# Altium PCB NaviGo v3.0.PcbDoc (part 4 of 4)
Units mm, origin at the board's own origin, x right, y up, seen from the top; angles counter-clockwise.
Board outline 144.78 x 52.07 mm, 2 copper layers (Top Layer, Bottom Layer); 380 components, 29 nets, 1630 pads, 230 vias.
Unrouted connection lines stored in the file: 261.
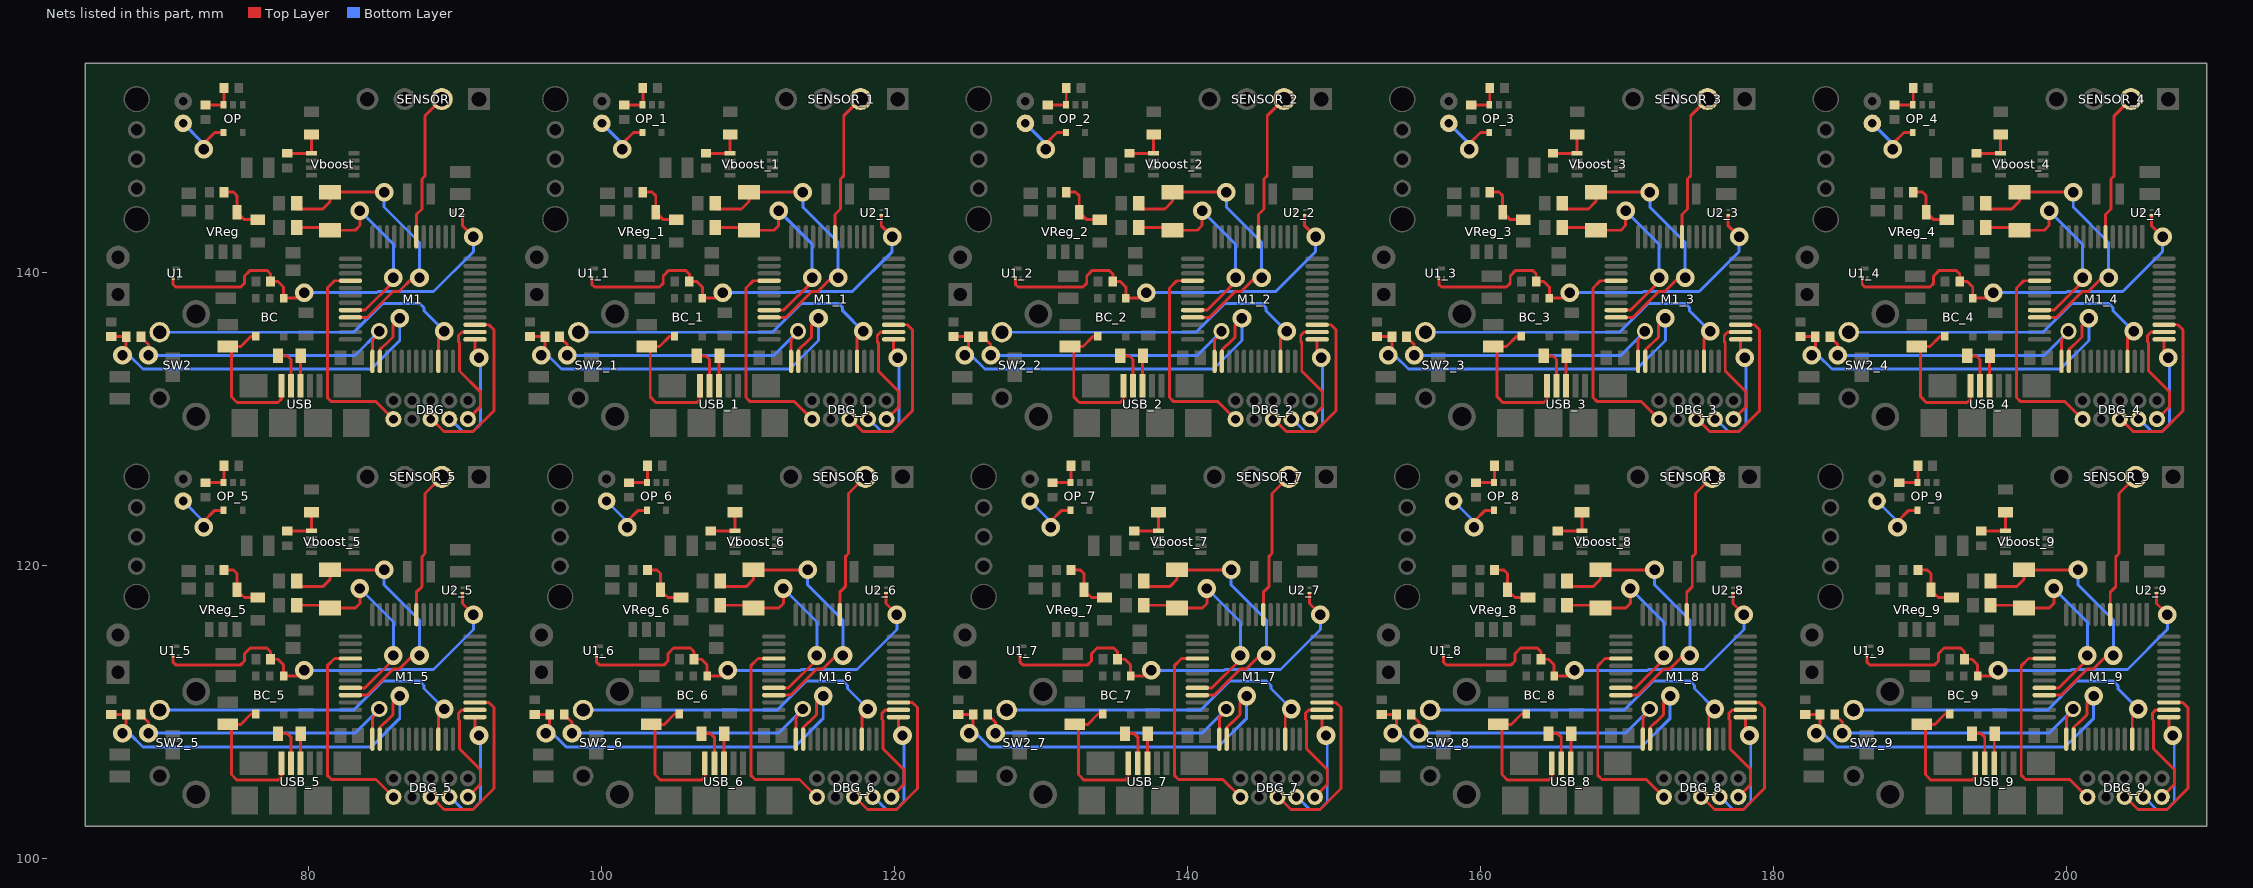
[diagram p4: the nets of this part, all layers, seen from the top]

## Via types
v1: diameter 1.27, hole 0.711, Top Layer to Bottom Layer, 220 vias
v2: diameter 1.1, hole 0.711, Top Layer to Bottom Layer, 10 vias

## Nets (pads, with @x,y where several pads share a name; then routed paths per layer and width w, separated by ;. In a path a pad name is that pad's centre, name@x,y a point inside that pad or via, vN(x,y) a via of type N, cw(c..) or ccw(c..) an arc to the next point about the centre after c; other vN are vias at no path point) (continued)
NetM1_25: M1.25 M1_1.25 M1_2.25 M1_3.25 M1_4.25 M1_5.25 M1_6.25 M1_7.25 M1_8.25 M1_9.25 R14.2 R14_1.2 R14_2.2 R14_3.2 R14_4.2 R14_5.2 R14_6.2 R14_7.2 R14_8.2 R14_9.2 | length 200.4
  Top Layer w0.2: R14_5.2@68.564,109.855 69.088,109.331 v1(69.088,108.585) ; R14.2@68.564,135.636 69.088,135.112 v1(69.088,134.366) ; M1_5.25@84.365,108.181 84.365,109.638 v2@84.836,110.109 ; M1.25@84.365,133.962 84.365,135.419 v2@84.836,135.89 ; R14_1.2@97.139,135.636 97.663,135.112 v1(97.663,134.366) ; R14_6.2@97.464,109.855 97.988,109.331 v1(97.988,108.585) ; M1_1.25@112.94,133.962 112.94,135.419 v2@113.411,135.89 ; M1_6.25@113.265,108.181 113.265,109.638 v2@113.736,110.109 ; R14_2.2@126.039,135.636 126.563,135.112 v1(126.563,134.366) ; R14_7.2@126.364,109.855 126.888,109.331 v1(126.888,108.585) ; M1_2.25@141.84,133.962 141.84,135.419 v2@142.311,135.89 ; M1_7.25@142.165,108.181 142.165,109.638 v2@142.636,110.109 ; R14_3.2@154.939,135.636 155.463,135.112 v1(155.463,134.366) ; R14_8.2@155.264,109.855 155.788,109.331 v1(155.788,108.585) ; M1_3.25@170.74,133.962 170.74,135.419 v2@171.211,135.89 ; M1_8.25@171.065,108.181 171.065,109.638 v2@171.536,110.109 ; R14_4.2@183.839,135.636 184.363,135.112 v1(184.363,134.366) ; R14_9.2@184.164,109.855 184.688,109.331 v1(184.688,108.585) ; M1_4.25@199.64,133.962 199.64,135.419 v2@200.111,135.89 ; M1_9.25@199.965,108.181 199.965,109.638 v2@200.436,110.109
  Bottom Layer w0.2: v1(69.088,108.585) 83.185,108.585 v2(84.836,110.236) ; v1(69.088,134.366) 83.185,134.366 v2(84.836,136.017) ; v1(97.663,134.366) 111.76,134.366 v2(113.411,136.017) ; v1(97.988,108.585) 112.085,108.585 v2(113.736,110.236) ; v1(126.563,134.366) 140.66,134.366 v2(142.311,136.017) ; v1(126.888,108.585) 140.985,108.585 v2(142.636,110.236) ; v1(155.463,134.366) 169.56,134.366 v2(171.211,136.017) ; v1(155.788,108.585) 169.885,108.585 v2(171.536,110.236) ; v1(184.363,134.366) 198.46,134.366 v2(200.111,136.017) ; v1(184.688,108.585) 198.785,108.585 v2(200.436,110.236)
NetM1_26: M1.26 M1_1.26 M1_2.26 M1_3.26 M1_4.26 M1_5.26 M1_6.26 M1_7.26 M1_8.26 M1_9.26 R13.2 R13_1.2 R13_2.2 R13_3.2 R13_4.2 R13_5.2 R13_6.2 R13_7.2 R13_8.2 R13_9.2 R14.1 R14_1.1 R14_2.1 R14_3.1 R14_4.1 R14_5.1 R14_6.1 R14_7.1 R14_8.1 R14_9.1 | length 275.7
  Top Layer w0.2: R13_5.2@66.548,109.871 67.548,109.871 R14_5.1@67.564,109.855 67.564,108.839 v1(67.31,108.585) ; R13.2@66.548,135.652 67.548,135.652 R14.1@67.564,135.636 67.564,134.62 v1(67.31,134.366) ; M1_5.26@84.865,108.181 84.865,108.967 85.199,109.301 85.223,109.301 85.771,109.849 85.771,110.663 v1(86.233,111.125) ; M1.26@84.865,133.962 84.865,134.748 85.199,135.082 85.223,135.082 85.771,135.63 85.771,136.444 v1(86.233,136.906) ; R13_1.2@95.123,135.652 96.123,135.652 R14_1.1@96.139,135.636 96.139,134.62 v1(95.885,134.366) ; R13_6.2@95.448,109.871 96.448,109.871 R14_6.1@96.464,109.855 96.464,108.839 v1(96.21,108.585) ; M1_1.26@113.44,133.962 113.44,134.748 113.774,135.082 113.798,135.082 114.346,135.63 114.346,136.444 v1(114.808,136.906) ; M1_6.26@113.765,108.181 113.765,108.967 114.099,109.301 114.123,109.301 114.671,109.849 114.671,110.663 v1(115.133,111.125) ; R13_2.2@124.023,135.652 125.023,135.652 R14_2.1@125.039,135.636 125.039,134.62 v1(124.785,134.366) ; R13_7.2@124.348,109.871 125.348,109.871 R14_7.1@125.364,109.855 125.364,108.839 v1(125.11,108.585) ; M1_2.26@142.34,133.962 142.34,134.748 142.674,135.082 142.698,135.082 143.246,135.63 143.246,136.444 v1(143.708,136.906) ; M1_7.26@142.665,108.181 142.665,108.967 142.999,109.301 143.023,109.301 143.571,109.849 143.571,110.663 v1(144.033,111.125) ; R13_3.2@152.923,135.652 153.923,135.652 R14_3.1@153.939,135.636 153.939,134.62 v1(153.685,134.366) ; R13_8.2@153.248,109.871 154.248,109.871 R14_8.1@154.264,109.855 154.264,108.839 v1(154.01,108.585) ; M1_3.26@171.24,133.962 171.24,134.748 171.574,135.082 171.598,135.082 172.146,135.63 172.146,136.444 v1(172.608,136.906) ; M1_8.26@171.565,108.181 171.565,108.967 171.899,109.301 171.923,109.301 172.471,109.849 172.471,110.663 v1(172.933,111.125) ; R13_4.2@181.823,135.652 182.823,135.652 R14_4.1@182.839,135.636 182.839,134.62 v1(182.585,134.366) ; R13_9.2@182.148,109.871 183.148,109.871 R14_9.1@183.164,109.855 183.164,108.839 v1(182.91,108.585) ; M1_4.26@200.14,133.962 200.14,134.748 200.474,135.082 200.498,135.082 201.046,135.63 201.046,136.444 v1(201.508,136.906) ; M1_9.26@200.465,108.181 200.465,108.967 200.799,109.301 200.823,109.301 201.371,109.849 201.371,110.663 v1(201.833,111.125)
  Bottom Layer w0.2: v1(67.31,108.585) 67.766,108.585 68.701,107.65 84.282,107.65 86.233,109.601 v1(86.233,111.125) ; v1(67.31,134.366) 67.766,134.366 68.701,133.431 84.282,133.431 86.233,135.382 v1(86.233,136.906) ; v1(95.885,134.366) 96.341,134.366 97.276,133.431 112.857,133.431 114.808,135.382 v1(114.808,136.906) ; v1(96.21,108.585) 96.666,108.585 97.601,107.65 113.182,107.65 115.133,109.601 v1(115.133,111.125) ; v1(124.785,134.366) 125.241,134.366 126.176,133.431 141.757,133.431 143.708,135.382 v1(143.708,136.906) ; v1(125.11,108.585) 125.566,108.585 126.501,107.65 142.082,107.65 144.033,109.601 v1(144.033,111.125) ; v1(153.685,134.366) 154.141,134.366 155.076,133.431 170.657,133.431 172.608,135.382 v1(172.608,136.906) ; v1(154.01,108.585) 154.466,108.585 155.401,107.65 170.982,107.65 172.933,109.601 v1(172.933,111.125) ; v1(182.585,134.366) 183.041,134.366 183.976,133.431 199.557,133.431 201.508,135.382 v1(201.508,136.906) ; v1(182.91,108.585) 183.366,108.585 184.301,107.65 199.882,107.65 201.833,109.601 v1(201.833,111.125)
NetM1_34: M1.34 M1_1.34 M1_2.34 M1_3.34 M1_4.34 M1_5.34 M1_6.34 M1_7.34 M1_8.34 M1_9.34 SW2.1 SW2_1.1 SW2_2.1 SW2_3.1 SW2_4.1 SW2_5.1 SW2_6.1 SW2_7.1 SW2_8.1 SW2_9.1 | length 233.8
  Top Layer w0.2: M1_5.34@88.865,108.181 88.865,109.82 v1(89.281,110.236) ; M1.34@88.865,133.962 88.865,135.601 v1(89.281,136.017) ; M1_1.34@117.44,133.962 117.44,135.601 v1(117.856,136.017) ; M1_6.34@117.765,108.181 117.765,109.82 v1(118.181,110.236) ; M1_2.34@146.34,133.962 146.34,135.601 v1(146.756,136.017) ; M1_7.34@146.665,108.181 146.665,109.82 v1(147.081,110.236) ; M1_3.34@175.24,133.962 175.24,135.601 v1(175.656,136.017) ; M1_8.34@175.565,108.181 175.565,109.82 v1(175.981,110.236) ; M1_4.34@204.14,133.962 204.14,135.601 v1(204.556,136.017) ; M1_9.34@204.465,108.181 204.465,109.82 v1(204.881,110.236)
  Bottom Layer w0.2: SW2_5.1@69.849,110.168 83.098,110.168 85.071,112.141 87.579,112.141 87.884,111.836 87.884,111.633 v1(89.281,110.236) ; SW2.1@69.849,135.949 83.098,135.949 85.071,137.922 87.579,137.922 87.884,137.617 87.884,137.414 v1(89.281,136.017) ; SW2_1.1@98.424,135.949 111.673,135.949 113.646,137.922 116.154,137.922 116.459,137.617 116.459,137.414 v1(117.856,136.017) ; SW2_6.1@98.749,110.168 111.998,110.168 113.971,112.141 116.479,112.141 116.784,111.836 116.784,111.633 v1(118.181,110.236) ; SW2_2.1@127.324,135.949 140.573,135.949 142.546,137.922 145.054,137.922 145.359,137.617 145.359,137.414 v1(146.756,136.017) ; SW2_7.1@127.649,110.168 140.898,110.168 142.871,112.141 145.379,112.141 145.684,111.836 145.684,111.633 v1(147.081,110.236) ; SW2_3.1@156.224,135.949 169.473,135.949 171.446,137.922 173.954,137.922 174.259,137.617 174.259,137.414 v1(175.656,136.017) ; SW2_8.1@156.549,110.168 169.798,110.168 171.771,112.141 174.279,112.141 174.584,111.836 174.584,111.633 v1(175.981,110.236) ; SW2_4.1@185.124,135.949 198.373,135.949 200.346,137.922 202.854,137.922 203.159,137.617 203.159,137.414 v1(204.556,136.017) ; SW2_9.1@185.449,110.168 198.698,110.168 200.671,112.141 203.179,112.141 203.484,111.836 203.484,111.633 v1(204.881,110.236)
NetMOTOR_1: MOTOR.1 MOTOR_1.1 MOTOR_2.1 MOTOR_3.1 MOTOR_4.1 MOTOR_5.1 MOTOR_6.1 MOTOR_7.1 MOTOR_8.1 MOTOR_9.1 OP.4 OP_1.4 OP_2.4 OP_3.4 OP_4.4 OP_5.4 OP_6.4 OP_7.4 OP_8.4 OP_9.4 | length 44.2
  Top Layer w0.2: v1(72.847,122.65) 72.847,123.031 73.614,123.798 OP_5.4@74.214,123.798 ; v1(72.847,148.431) 72.847,148.812 73.614,149.579 OP.4@74.214,149.579 ; v1(101.422,148.431) 101.422,148.812 102.189,149.579 OP_1.4@102.789,149.579 ; v1(101.747,122.65) 101.747,123.031 102.514,123.798 OP_6.4@103.114,123.798 ; v1(130.322,148.431) 130.322,148.812 131.089,149.579 OP_2.4@131.689,149.579 ; v1(130.647,122.65) 130.647,123.031 131.414,123.798 OP_7.4@132.014,123.798 ; v1(159.222,148.431) 159.222,148.812 159.989,149.579 OP_3.4@160.589,149.579 ; v1(159.547,122.65) 159.547,123.031 160.314,123.798 OP_8.4@160.914,123.798 ; v1(188.122,148.431) 188.122,148.812 188.889,149.579 OP_4.4@189.489,149.579 ; v1(188.447,122.65) 188.447,123.031 189.214,123.798 OP_9.4@189.814,123.798
  Bottom Layer w0.2: MOTOR_5.1@71.45,124.428 72.847,123.031 v1(72.847,122.65) ; MOTOR.1@71.45,150.209 72.847,148.812 v1(72.847,148.431) ; MOTOR_1.1@100.025,150.209 101.422,148.812 v1(101.422,148.431) ; MOTOR_6.1@100.35,124.428 101.747,123.031 v1(101.747,122.65) ; MOTOR_2.1@128.925,150.209 130.322,148.812 v1(130.322,148.431) ; MOTOR_7.1@129.25,124.428 130.647,123.031 v1(130.647,122.65) ; MOTOR_3.1@157.825,150.209 159.222,148.812 v1(159.222,148.431) ; MOTOR_8.1@158.15,124.428 159.547,123.031 v1(159.547,122.65) ; MOTOR_4.1@186.725,150.209 188.122,148.812 v1(188.122,148.431) ; MOTOR_9.1@187.05,124.428 188.447,123.031 v1(188.447,122.65)
NetOP_3: OP.3 OP_1.3 OP_2.3 OP_3.3 OP_4.3 OP_5.3 OP_6.3 OP_7.3 OP_8.3 OP_9.3 R5.1 R5_1.1 R5_2.1 R5_3.1 R5_4.1 R5_5.1 R5_6.1 R5_7.1 R5_8.1 R5_9.1 R6.2 R6_1.2 R6_2.2 R6_3.2 R6_4.2 R6_5.2 R6_6.2 R6_7.2 R6_8.2 R6_9.2 | length 24
  Top Layer w0.2: R6_5.2@72.974,125.682 74.198,125.682 OP_5.3@74.214,125.698 74.244,125.728 R5_5.1@74.244,126.841 ; R6.2@72.974,151.463 74.198,151.463 OP.3@74.214,151.479 74.244,151.509 R5.1@74.244,152.622 ; R6_1.2@101.549,151.463 102.773,151.463 OP_1.3@102.789,151.479 102.819,151.509 R5_1.1@102.819,152.622 ; R6_6.2@101.874,125.682 103.098,125.682 OP_6.3@103.114,125.698 103.144,125.728 R5_6.1@103.144,126.841 ; R6_2.2@130.449,151.463 131.673,151.463 OP_2.3@131.689,151.479 131.719,151.509 R5_2.1@131.719,152.622 ; R6_7.2@130.774,125.682 131.998,125.682 OP_7.3@132.014,125.698 132.044,125.728 R5_7.1@132.044,126.841 ; R6_3.2@159.349,151.463 160.573,151.463 OP_3.3@160.589,151.479 160.619,151.509 R5_3.1@160.619,152.622 ; R6_8.2@159.674,125.682 160.898,125.682 OP_8.3@160.914,125.698 160.944,125.728 R5_8.1@160.944,126.841 ; R6_4.2@188.249,151.463 189.473,151.463 OP_4.3@189.489,151.479 189.519,151.509 R5_4.1@189.519,152.622 ; R6_9.2@188.574,125.682 189.798,125.682 OP_9.3@189.814,125.698 189.844,125.728 R5_9.1@189.844,126.841
NetR1_2: R1.2 R1_1.2 R1_2.2 R1_3.2 R1_4.2 R1_5.2 R1_6.2 R1_7.2 R1_8.2 R1_9.2 R2.1 R2_1.1 R2_2.1 R2_3.1 R2_4.1 R2_5.1 R2_6.1 R2_7.1 R2_8.1 R2_9.1 Vboost.1 Vboost_1.1 Vboost_2.1 Vboost_3.1 Vboost_4.1 Vboost_5.1 Vboost_6.1 Vboost_7.1 Vboost_8.1 Vboost_9.1 | length 29.3
  Top Layer w0.2: R1_5.2@78.562,122.38 80.196,122.38 Vboost_5.1@80.207,122.391 80.207,123.66 R2_5.1@80.213,123.666 ; R1.2@78.562,148.161 80.196,148.161 Vboost.1@80.207,148.172 80.207,149.441 R2.1@80.213,149.447 ; R1_1.2@107.137,148.161 108.771,148.161 Vboost_1.1@108.782,148.172 108.782,149.441 R2_1.1@108.788,149.447 ; R1_6.2@107.462,122.38 109.096,122.38 Vboost_6.1@109.107,122.391 109.107,123.66 R2_6.1@109.113,123.666 ; R1_2.2@136.037,148.161 137.671,148.161 Vboost_2.1@137.682,148.172 137.682,149.441 R2_2.1@137.688,149.447 ; R1_7.2@136.362,122.38 137.996,122.38 Vboost_7.1@138.007,122.391 138.007,123.66 R2_7.1@138.013,123.666 ; R1_3.2@164.937,148.161 166.571,148.161 Vboost_3.1@166.582,148.172 166.582,149.441 R2_3.1@166.588,149.447 ; R1_8.2@165.262,122.38 166.896,122.38 Vboost_8.1@166.907,122.391 166.907,123.66 R2_8.1@166.913,123.666 ; R1_4.2@193.837,148.161 195.471,148.161 Vboost_4.1@195.482,148.172 195.482,149.441 R2_4.1@195.488,149.447 ; R1_9.2@194.162,122.38 195.796,122.38 Vboost_9.1@195.807,122.391 195.807,123.66 R2_9.1@195.813,123.666
NetR8_1: R8.1 R8_1.1 R8_2.1 R8_3.1 R8_4.1 R8_5.1 R8_6.1 R8_7.1 R8_8.1 R8_9.1 R9.2 R9_1.2 R9_2.2 R9_3.2 R9_4.2 R9_5.2 R9_6.2 R9_7.2 R9_8.2 R9_9.2 VReg.4 VReg_1.4 VReg_2.4 VReg_3.4 VReg_4.4 VReg_5.4 VReg_6.4 VReg_7.4 VReg_8.4 VReg_9.4 | length 37.2
  Top Layer w0.2: R8_5.1@74.244,119.729 74.879,119.729 75.128,119.48 VReg_5.4@75.128,118.365 75.643,117.85 R9_5.2@76.53,117.85 ; R8.1@74.244,145.51 74.879,145.51 75.128,145.261 VReg.4@75.128,144.146 75.643,143.631 R9.2@76.53,143.631 ; R8_1.1@102.819,145.51 103.454,145.51 103.703,145.261 VReg_1.4@103.703,144.146 104.218,143.631 R9_1.2@105.105,143.631 ; R8_6.1@103.144,119.729 103.779,119.729 104.028,119.48 VReg_6.4@104.028,118.365 104.543,117.85 R9_6.2@105.43,117.85 ; R8_2.1@131.719,145.51 132.354,145.51 132.603,145.261 VReg_2.4@132.603,144.146 133.118,143.631 R9_2.2@134.005,143.631 ; R8_7.1@132.044,119.729 132.679,119.729 132.928,119.48 VReg_7.4@132.928,118.365 133.443,117.85 R9_7.2@134.33,117.85 ; R8_3.1@160.619,145.51 161.254,145.51 161.503,145.261 VReg_3.4@161.503,144.146 162.018,143.631 R9_3.2@162.905,143.631 ; R8_8.1@160.944,119.729 161.579,119.729 161.828,119.48 VReg_8.4@161.828,118.365 162.343,117.85 R9_8.2@163.23,117.85 ; R8_4.1@189.519,145.51 190.154,145.51 190.403,145.261 VReg_4.4@190.403,144.146 190.918,143.631 R9_4.2@191.805,143.631 ; R8_9.1@189.844,119.729 190.479,119.729 190.728,119.48 VReg_9.4@190.728,118.365 191.243,117.85 R9_9.2@192.13,117.85
NetR11_1: R11.1 R11_1.1 R11_2.1 R11_3.1 R11_4.1 R11_5.1 R11_6.1 R11_7.1 R11_8.1 R11_9.1 USB.2 USB_1.2 USB_2.2 USB_3.2 USB_4.2 USB_5.2 USB_6.2 USB_7.2 USB_8.2 USB_9.2 | length 23.8
  Top Layer w0.2: R11_5.1@77.927,108.553 78.562,108.553 78.801,108.314 USB_5.2@78.801,106.91 ; R11.1@77.927,134.334 78.562,134.334 78.801,134.095 USB.2@78.801,132.691 ; R11_1.1@106.502,134.334 107.137,134.334 107.376,134.095 USB_1.2@107.376,132.691 ; R11_6.1@106.827,108.553 107.462,108.553 107.701,108.314 USB_6.2@107.701,106.91 ; R11_2.1@135.402,134.334 136.037,134.334 136.276,134.095 USB_2.2@136.276,132.691 ; R11_7.1@135.727,108.553 136.362,108.553 136.601,108.314 USB_7.2@136.601,106.91 ; R11_3.1@164.302,134.334 164.937,134.334 165.176,134.095 USB_3.2@165.176,132.691 ; R11_8.1@164.627,108.553 165.262,108.553 165.501,108.314 USB_8.2@165.501,106.91 ; R11_4.1@193.202,134.334 193.837,134.334 194.076,134.095 USB_4.2@194.076,132.691 ; R11_9.1@193.527,108.553 194.162,108.553 194.401,108.314 USB_9.2@194.401,106.91
NetR11_2: R11.2 R11_1.2 R11_2.2 R11_3.2 R11_4.2 R11_5.2 R11_6.2 R11_7.2 R11_8.2 R11_9.2 USB.3 USB_1.3 USB_2.3 USB_3.3 USB_4.3 USB_5.3 USB_6.3 USB_7.3 USB_8.3 USB_9.3 | length 16.5
  Top Layer w0.2: USB_5.3@79.451,106.91 79.451,108.527 R11_5.2@79.477,108.553 ; USB.3@79.451,132.691 79.451,134.308 R11.2@79.477,134.334 ; USB_1.3@108.026,132.691 108.026,134.308 R11_1.2@108.052,134.334 ; USB_6.3@108.351,106.91 108.351,108.527 R11_6.2@108.377,108.553 ; USB_2.3@136.926,132.691 136.926,134.308 R11_2.2@136.952,134.334 ; USB_7.3@137.251,106.91 137.251,108.527 R11_7.2@137.277,108.553 ; USB_3.3@165.826,132.691 165.826,134.308 R11_3.2@165.852,134.334 ; USB_8.3@166.151,106.91 166.151,108.527 R11_8.2@166.177,108.553 ; USB_4.3@194.726,132.691 194.726,134.308 R11_4.2@194.752,134.334 ; USB_9.3@195.051,106.91 195.051,108.527 R11_9.2@195.077,108.553
RESETN: DBG.1 DBG_1.1 DBG_2.1 DBG_3.1 DBG_4.1 DBG_5.1 DBG_6.1 DBG_7.1 DBG_8.1 DBG_9.1 M1.16 M1_1.16 M1_2.16 M1_3.16 M1_4.16 M1_5.16 M1_6.16 M1_7.16 M1_8.16 M1_9.16 | length 143.7
  Top Layer w0.2: M1_5.16@82.865,113.681 81.785,113.681 81.291,113.187 81.291,105.717 81.577,105.431 84.605,105.431 DBG_5.1@85.801,104.235 ; M1.16@82.865,139.462 81.785,139.462 81.291,138.968 81.291,131.498 81.577,131.212 84.605,131.212 DBG.1@85.801,130.016 ; M1_1.16@111.44,139.462 110.36,139.462 109.866,138.968 109.866,131.498 110.152,131.212 113.18,131.212 DBG_1.1@114.376,130.016 ; M1_6.16@111.765,113.681 110.685,113.681 110.191,113.187 110.191,105.717 110.477,105.431 113.505,105.431 DBG_6.1@114.701,104.235 ; M1_2.16@140.34,139.462 139.26,139.462 138.766,138.968 138.766,131.498 139.052,131.212 142.08,131.212 DBG_2.1@143.276,130.016 ; M1_7.16@140.665,113.681 139.585,113.681 139.091,113.187 139.091,105.717 139.377,105.431 142.405,105.431 DBG_7.1@143.601,104.235 ; M1_3.16@169.24,139.462 168.16,139.462 167.666,138.968 167.666,131.498 167.952,131.212 170.98,131.212 DBG_3.1@172.176,130.016 ; M1_8.16@169.565,113.681 168.485,113.681 167.991,113.187 167.991,105.717 168.277,105.431 171.305,105.431 DBG_8.1@172.501,104.235 ; M1_4.16@198.14,139.462 197.06,139.462 196.566,138.968 196.566,131.498 196.852,131.212 199.88,131.212 DBG_4.1@201.076,130.016 ; M1_9.16@198.465,113.681 197.385,113.681 196.891,113.187 196.891,105.717 197.177,105.431 200.205,105.431 DBG_9.1@201.401,104.235
STAT: BC.1 BC_1.1 BC_2.1 BC_3.1 BC_4.1 BC_5.1 BC_6.1 BC_7.1 BC_8.1 BC_9.1 R12.1 R12_1.1 R12_2.1 R12_3.1 R12_4.1 R12_5.1 R12_6.1 R12_7.1 R12_8.1 R12_9.1 U1.2 U1_1.2 U1_2.2 U1_3.2 U1_4.2 U1_5.2 U1_6.2 U1_7.2 U1_8.2 U1_9.2 U2.2 U2_1.2 U2_2.2 U2_3.2 U2_4.2 U2_5.2 U2_6.2 U2_7.2 U2_8.2 U2_9.2 | length 274.3
  Top Layer w0.2: U1_5.2@70.767,113.872 70.767,113.427 70.942,113.252 75.387,113.252 75.641,113.506 75.641,114.014 76.022,114.395 77.165,114.395 77.419,114.141 R12_5.1@77.419,113.633 77.927,113.633 78.308,113.252 BC_5.1@78.308,112.49 79.324,112.49 v1(79.705,112.871) ; U1.2@70.767,139.653 70.767,139.208 70.942,139.033 75.387,139.033 75.641,139.287 75.641,139.795 76.022,140.176 77.165,140.176 77.419,139.922 R12.1@77.419,139.414 77.927,139.414 78.308,139.033 BC.1@78.308,138.271 79.324,138.271 v1(79.705,138.652) ; U2_5.2@90.515,118.157 90.515,117.428 v1(91.262,116.681) ; U2.2@90.515,143.938 90.515,143.209 v1(91.262,142.462) ; U1_1.2@99.342,139.653 99.342,139.208 99.517,139.033 103.962,139.033 104.216,139.287 104.216,139.795 104.597,140.176 105.74,140.176 105.994,139.922 R12_1.1@105.994,139.414 106.502,139.414 106.883,139.033 BC_1.1@106.883,138.271 107.899,138.271 v1(108.28,138.652) ; U1_6.2@99.667,113.872 99.667,113.427 99.842,113.252 104.287,113.252 104.541,113.506 104.541,114.014 104.922,114.395 106.065,114.395 106.319,114.141 R12_6.1@106.319,113.633 106.827,113.633 107.208,113.252 BC_6.1@107.208,112.49 108.224,112.49 v1(108.605,112.871) ; U2_1.2@119.09,143.938 119.09,143.209 v1(119.837,142.462) ; U2_6.2@119.415,118.157 119.415,117.428 v1(120.162,116.681) ; U1_2.2@128.242,139.653 128.242,139.208 128.417,139.033 132.862,139.033 133.116,139.287 133.116,139.795 133.497,140.176 134.64,140.176 134.894,139.922 R12_2.1@134.894,139.414 135.402,139.414 135.783,139.033 BC_2.1@135.783,138.271 136.799,138.271 v1(137.18,138.652) ; U1_7.2@128.567,113.872 128.567,113.427 128.742,113.252 133.187,113.252 133.441,113.506 133.441,114.014 133.822,114.395 134.965,114.395 135.219,114.141 R12_7.1@135.219,113.633 135.727,113.633 136.108,113.252 BC_7.1@136.108,112.49 137.124,112.49 v1(137.505,112.871) ; U2_2.2@147.99,143.938 147.99,143.209 v1(148.737,142.462) ; U2_7.2@148.315,118.157 148.315,117.428 v1(149.062,116.681) ; U1_3.2@157.142,139.653 157.142,139.208 157.317,139.033 161.762,139.033 162.016,139.287 162.016,139.795 162.397,140.176 163.54,140.176 163.794,139.922 R12_3.1@163.794,139.414 164.302,139.414 164.683,139.033 BC_3.1@164.683,138.271 165.699,138.271 v1(166.08,138.652) ; U1_8.2@157.467,113.872 157.467,113.427 157.642,113.252 162.087,113.252 162.341,113.506 162.341,114.014 162.722,114.395 163.865,114.395 164.119,114.141 R12_8.1@164.119,113.633 164.627,113.633 165.008,113.252 BC_8.1@165.008,112.49 166.024,112.49 v1(166.405,112.871) ; U2_3.2@176.89,143.938 176.89,143.209 v1(177.637,142.462) ; U2_8.2@177.215,118.157 177.215,117.428 v1(177.962,116.681) ; U1_4.2@186.042,139.653 186.042,139.208 186.217,139.033 190.662,139.033 190.916,139.287 190.916,139.795 191.297,140.176 192.44,140.176 192.694,139.922 R12_4.1@192.694,139.414 193.202,139.414 193.583,139.033 BC_4.1@193.583,138.271 194.599,138.271 v1(194.98,138.652) ; U1_9.2@186.367,113.872 186.367,113.427 186.542,113.252 190.987,113.252 191.241,113.506 191.241,114.014 191.622,114.395 192.765,114.395 193.019,114.141 R12_9.1@193.019,113.633 193.527,113.633 193.908,113.252 BC_9.1@193.908,112.49 194.924,112.49 v1(195.305,112.871) ; U2_4.2@205.79,143.938 205.79,143.209 v1(206.537,142.462) ; U2_9.2@206.115,118.157 206.115,117.428 v1(206.862,116.681)
  Bottom Layer w0.2: v1(79.705,112.871) 84.67,112.871 84.74,112.941 88.538,112.941 91.262,115.665 v1(91.262,116.681) ; v1(79.705,138.652) 84.67,138.652 84.74,138.722 88.538,138.722 91.262,141.446 v1(91.262,142.462) ; v1(108.28,138.652) 113.245,138.652 113.315,138.722 117.113,138.722 119.837,141.446 v1(119.837,142.462) ; v1(108.605,112.871) 113.57,112.871 113.64,112.941 117.438,112.941 120.162,115.665 v1(120.162,116.681) ; v1(137.18,138.652) 142.145,138.652 142.215,138.722 146.013,138.722 148.737,141.446 v1(148.737,142.462) ; v1(137.505,112.871) 142.47,112.871 142.54,112.941 146.338,112.941 149.062,115.665 v1(149.062,116.681) ; v1(166.08,138.652) 171.045,138.652 171.115,138.722 174.913,138.722 177.637,141.446 v1(177.637,142.462) ; v1(166.405,112.871) 171.37,112.871 171.44,112.941 175.238,112.941 177.962,115.665 v1(177.962,116.681) ; v1(194.98,138.652) 199.945,138.652 200.015,138.722 203.813,138.722 206.537,141.446 v1(206.537,142.462) ; v1(195.305,112.871) 200.27,112.871 200.34,112.941 204.138,112.941 206.862,115.665 v1(206.862,116.681)
SWCLK: DBG.4 DBG_1.4 DBG_2.4 DBG_3.4 DBG_4.4 DBG_5.4 DBG_6.4 DBG_7.4 DBG_8.4 DBG_9.4 M1.37 M1_1.37 M1_2.37 M1_3.37 M1_4.37 M1_5.37 M1_6.37 M1_7.37 M1_8.37 M1_9.37 | length 87.6
  Top Layer w0.2: DBG_5.4@89.611,104.235 DBG_5.4@89.679,104.235 ; DBG_5.4@89.611,104.489 DBG_5.4@89.679,104.489 ; DBG.4@89.611,130.016 DBG.4@89.679,130.016 ; DBG.4@89.611,130.27 DBG.4@89.679,130.27 ; M1_5.37@91.365,109.681 91.365,108.704 v1(91.643,108.426) ; M1.37@91.365,135.462 91.365,134.485 v1(91.643,134.207) ; DBG_1.4@118.186,130.016 DBG_1.4@118.254,130.016 ; DBG_1.4@118.186,130.27 DBG_1.4@118.254,130.27 ; DBG_6.4@118.511,104.235 DBG_6.4@118.579,104.235 ; DBG_6.4@118.511,104.489 DBG_6.4@118.579,104.489 ; M1_1.37@119.94,135.462 119.94,134.485 v1(120.218,134.207) ; M1_6.37@120.265,109.681 120.265,108.704 v1(120.543,108.426) ; DBG_2.4@147.086,130.016 DBG_2.4@147.154,130.016 ; DBG_2.4@147.086,130.27 DBG_2.4@147.154,130.27 ; DBG_7.4@147.411,104.235 DBG_7.4@147.479,104.235 ; DBG_7.4@147.411,104.489 DBG_7.4@147.479,104.489 ; M1_2.37@148.84,135.462 148.84,134.485 v1(149.118,134.207) ; M1_7.37@149.165,109.681 149.165,108.704 v1(149.443,108.426) ; DBG_3.4@175.986,130.016 DBG_3.4@176.054,130.016 ; DBG_3.4@175.986,130.27 DBG_3.4@176.054,130.27 ; DBG_8.4@176.311,104.235 DBG_8.4@176.379,104.235 ; DBG_8.4@176.311,104.489 DBG_8.4@176.379,104.489 ; M1_3.37@177.74,135.462 177.74,134.485 v1(178.018,134.207) ; M1_8.37@178.065,109.681 178.065,108.704 v1(178.343,108.426) ; DBG_4.4@204.886,130.016 DBG_4.4@204.954,130.016 ; DBG_4.4@204.886,130.27 DBG_4.4@204.954,130.27 ; DBG_9.4@205.211,104.235 DBG_9.4@205.279,104.235 ; DBG_9.4@205.211,104.489 DBG_9.4@205.279,104.489 ; M1_4.37@206.64,135.462 206.64,134.485 v1(206.918,134.207) ; M1_9.37@206.965,109.681 206.965,108.704 v1(207.243,108.426)
  Bottom Layer w0.2: DBG_5.4@89.611,104.235 89.679,104.235 90.529,103.385 91.233,103.385 91.731,103.883 91.731,108.338 v1(91.643,108.426) ; DBG.4@89.611,130.016 89.679,130.016 90.529,129.166 91.233,129.166 91.731,129.664 91.731,134.119 v1(91.643,134.207) ; DBG_1.4@118.186,130.016 118.254,130.016 119.104,129.166 119.808,129.166 120.306,129.664 120.306,134.119 v1(120.218,134.207) ; DBG_6.4@118.511,104.235 118.579,104.235 119.429,103.385 120.133,103.385 120.631,103.883 120.631,108.338 v1(120.543,108.426) ; DBG_2.4@147.086,130.016 147.154,130.016 148.004,129.166 148.708,129.166 149.206,129.664 149.206,134.119 v1(149.118,134.207) ; DBG_7.4@147.411,104.235 147.479,104.235 148.329,103.385 149.033,103.385 149.531,103.883 149.531,108.338 v1(149.443,108.426) ; DBG_3.4@175.986,130.016 176.054,130.016 176.904,129.166 177.608,129.166 178.106,129.664 178.106,134.119 v1(178.018,134.207) ; DBG_8.4@176.311,104.235 176.379,104.235 177.229,103.385 177.933,103.385 178.431,103.883 178.431,108.338 v1(178.343,108.426) ; DBG_4.4@204.886,130.016 204.954,130.016 205.804,129.166 206.508,129.166 207.006,129.664 207.006,134.119 v1(206.918,134.207) ; DBG_9.4@205.211,104.235 205.279,104.235 206.129,103.385 206.833,103.385 207.331,103.883 207.331,108.338 v1(207.243,108.426)
SWDIO: DBG.5 DBG_1.5 DBG_2.5 DBG_3.5 DBG_4.5 DBG_5.5 DBG_6.5 DBG_7.5 DBG_8.5 DBG_9.5 M1.38 M1_1.38 M1_2.38 M1_3.38 M1_4.38 M1_5.38 M1_6.38 M1_7.38 M1_8.38 M1_9.38 | length 79.6
  Top Layer w0.2: DBG_5.5@90.881,104.235 91.731,105.085 91.731,106.111 90.315,107.527 90.315,109.445 90.246,109.514 90.246,109.95 90.477,110.181 M1_5.38@91.365,110.181 ; DBG.5@90.881,130.016 91.731,130.866 91.731,131.892 90.315,133.308 90.315,135.226 90.246,135.295 90.246,135.731 90.477,135.962 M1.38@91.365,135.962 ; DBG_1.5@119.456,130.016 120.306,130.866 120.306,131.892 118.89,133.308 118.89,135.226 118.821,135.295 118.821,135.731 119.052,135.962 M1_1.38@119.94,135.962 ; DBG_6.5@119.781,104.235 120.631,105.085 120.631,106.111 119.215,107.527 119.215,109.445 119.146,109.514 119.146,109.95 119.377,110.181 M1_6.38@120.265,110.181 ; DBG_2.5@148.356,130.016 149.206,130.866 149.206,131.892 147.79,133.308 147.79,135.226 147.721,135.295 147.721,135.731 147.952,135.962 M1_2.38@148.84,135.962 ; DBG_7.5@148.681,104.235 149.531,105.085 149.531,106.111 148.115,107.527 148.115,109.445 148.046,109.514 148.046,109.95 148.277,110.181 M1_7.38@149.165,110.181 ; DBG_3.5@177.256,130.016 178.106,130.866 178.106,131.892 176.69,133.308 176.69,135.226 176.621,135.295 176.621,135.731 176.852,135.962 M1_3.38@177.74,135.962 ; DBG_8.5@177.581,104.235 178.431,105.085 178.431,106.111 177.015,107.527 177.015,109.445 176.946,109.514 176.946,109.95 177.177,110.181 M1_8.38@178.065,110.181 ; DBG_4.5@206.156,130.016 207.006,130.866 207.006,131.892 205.59,133.308 205.59,135.226 205.521,135.295 205.521,135.731 205.752,135.962 M1_4.38@206.64,135.962 ; DBG_9.5@206.481,104.235 207.331,105.085 207.331,106.111 205.915,107.527 205.915,109.445 205.846,109.514 205.846,109.95 206.077,110.181 M1_9.38@206.965,110.181
  Bottom Layer w0.2: DBG_5.5@90.881,104.489 DBG_5.5@90.881,104.557 ; DBG.5@90.881,130.27 DBG.5@90.881,130.338 ; DBG_1.5@119.456,130.27 DBG_1.5@119.456,130.338 ; DBG_6.5@119.781,104.489 DBG_6.5@119.781,104.557 ; DBG_2.5@148.356,130.27 DBG_2.5@148.356,130.338 ; DBG_7.5@148.681,104.489 DBG_7.5@148.681,104.557 ; DBG_3.5@177.256,130.27 DBG_3.5@177.256,130.338 ; DBG_8.5@177.581,104.489 DBG_8.5@177.581,104.557 ; DBG_4.5@206.156,130.27 DBG_4.5@206.156,130.338 ; DBG_9.5@206.481,104.489 DBG_9.5@206.481,104.557
SWO: DBG.3 DBG_1.3 DBG_2.3 DBG_3.3 DBG_4.3 DBG_5.3 DBG_6.3 DBG_7.3 DBG_8.3 DBG_9.3 M1.39 M1_1.39 M1_2.39 M1_3.39 M1_4.39 M1_5.39 M1_6.39 M1_7.39 M1_8.39 M1_9.39 | length 122.2
  Top Layer w0.2: DBG_5.3@88.341,104.235 88.409,104.235 89.259,103.385 91.233,103.385 92.659,104.811 92.659,110.331 92.309,110.681 M1_5.39@91.365,110.681 ; DBG.3@88.341,130.016 88.409,130.016 89.259,129.166 91.233,129.166 92.659,130.592 92.659,136.112 92.309,136.462 M1.39@91.365,136.462 ; DBG_1.3@116.916,130.016 116.984,130.016 117.834,129.166 119.808,129.166 121.234,130.592 121.234,136.112 120.884,136.462 M1_1.39@119.94,136.462 ; DBG_6.3@117.241,104.235 117.309,104.235 118.159,103.385 120.133,103.385 121.559,104.811 121.559,110.331 121.209,110.681 M1_6.39@120.265,110.681 ; DBG_2.3@145.816,130.016 145.884,130.016 146.734,129.166 148.708,129.166 150.134,130.592 150.134,136.112 149.784,136.462 M1_2.39@148.84,136.462 ; DBG_7.3@146.141,104.235 146.209,104.235 147.059,103.385 149.033,103.385 150.459,104.811 150.459,110.331 150.109,110.681 M1_7.39@149.165,110.681 ; DBG_3.3@174.716,130.016 174.784,130.016 175.634,129.166 177.608,129.166 179.034,130.592 179.034,136.112 178.684,136.462 M1_3.39@177.74,136.462 ; DBG_8.3@175.041,104.235 175.109,104.235 175.959,103.385 177.933,103.385 179.359,104.811 179.359,110.331 179.009,110.681 M1_8.39@178.065,110.681 ; DBG_4.3@203.616,130.016 203.684,130.016 204.534,129.166 206.508,129.166 207.934,130.592 207.934,136.112 207.584,136.462 M1_4.39@206.64,136.462 ; DBG_9.3@203.941,104.235 204.009,104.235 204.859,103.385 206.833,103.385 208.259,104.811 208.259,110.331 207.909,110.681 M1_9.39@206.965,110.681
TRIG: M1.6 M1_1.6 M1_2.6 M1_3.6 M1_4.6 M1_5.6 M1_6.6 M1_7.6 M1_8.6 M1_9.6 SENSOR.2 SENSOR_1.2 SENSOR_2.2 SENSOR_3.2 SENSOR_4.2 SENSOR_5.2 SENSOR_6.2 SENSOR_7.2 SENSOR_8.2 SENSOR_9.2 | length 101.2
  Top Layer w0.2: M1_5.6@87.365,116.681 87.365,118.211 87.741,118.587 87.741,120.627 87.96,120.846 87.96,124.936 SENSOR_5.2@89.103,126.079 ; M1.6@87.365,142.462 87.365,143.992 87.741,144.368 87.741,146.408 87.96,146.627 87.96,150.717 SENSOR.2@89.103,151.86 ; M1_1.6@115.94,142.462 115.94,143.992 116.316,144.368 116.316,146.408 116.535,146.627 116.535,150.717 SENSOR_1.2@117.678,151.86 ; M1_6.6@116.265,116.681 116.265,118.211 116.641,118.587 116.641,120.627 116.86,120.846 116.86,124.936 SENSOR_6.2@118.003,126.079 ; M1_2.6@144.84,142.462 144.84,143.992 145.216,144.368 145.216,146.408 145.435,146.627 145.435,150.717 SENSOR_2.2@146.578,151.86 ; M1_7.6@145.165,116.681 145.165,118.211 145.541,118.587 145.541,120.627 145.76,120.846 145.76,124.936 SENSOR_7.2@146.903,126.079 ; M1_3.6@173.74,142.462 173.74,143.992 174.116,144.368 174.116,146.408 174.335,146.627 174.335,150.717 SENSOR_3.2@175.478,151.86 ; M1_8.6@174.065,116.681 174.065,118.211 174.441,118.587 174.441,120.627 174.66,120.846 174.66,124.936 SENSOR_8.2@175.803,126.079 ; M1_4.6@202.64,142.462 202.64,143.992 203.016,144.368 203.016,146.408 203.235,146.627 203.235,150.717 SENSOR_4.2@204.378,151.86 ; M1_9.6@202.965,116.681 202.965,118.211 203.341,118.587 203.341,120.627 203.56,120.846 203.56,124.936 SENSOR_9.2@204.703,126.079
VUSB: BC.4 BC_1.4 BC_2.4 BC_3.4 BC_4.4 BC_5.4 BC_6.4 BC_7.4 BC_8.4 BC_9.4 C11.1 C11_1.1 C11_2.1 C11_3.1 C11_4.1 C11_5.1 C11_6.1 C11_7.1 C11_8.1 C11_9.1 USB.1 USB_1.1 USB_2.1 USB_3.1 USB_4.1 USB_5.1 USB_6.1 USB_7.1 USB_8.1 USB_9.1 | length 103.1
  Top Layer w0.2: BC_5.4@76.408,109.89 76.089,109.89 75.387,109.188 C11_5.1@74.498,109.188 74.752,108.934 74.752,105.759 75.133,105.378 77.927,105.378 78.151,105.602 USB_5.1@78.151,106.531 ; BC.4@76.408,135.671 76.089,135.671 75.387,134.969 C11.1@74.498,134.969 74.752,134.715 74.752,131.54 75.133,131.159 77.927,131.159 78.151,131.383 USB.1@78.151,132.312 ; BC_1.4@104.983,135.671 104.664,135.671 103.962,134.969 C11_1.1@103.073,134.969 103.327,134.715 103.327,131.54 103.708,131.159 106.502,131.159 106.726,131.383 USB_1.1@106.726,132.312 ; BC_6.4@105.308,109.89 104.989,109.89 104.287,109.188 C11_6.1@103.398,109.188 103.652,108.934 103.652,105.759 104.033,105.378 106.827,105.378 107.051,105.602 USB_6.1@107.051,106.531 ; BC_2.4@133.883,135.671 133.564,135.671 132.862,134.969 C11_2.1@131.973,134.969 132.227,134.715 132.227,131.54 132.608,131.159 135.402,131.159 135.626,131.383 USB_2.1@135.626,132.312 ; BC_7.4@134.208,109.89 133.889,109.89 133.187,109.188 C11_7.1@132.298,109.188 132.552,108.934 132.552,105.759 132.933,105.378 135.727,105.378 135.951,105.602 USB_7.1@135.951,106.531 ; BC_3.4@162.783,135.671 162.464,135.671 161.762,134.969 C11_3.1@160.873,134.969 161.127,134.715 161.127,131.54 161.508,131.159 164.302,131.159 164.526,131.383 USB_3.1@164.526,132.312 ; BC_8.4@163.108,109.89 162.789,109.89 162.087,109.188 C11_8.1@161.198,109.188 161.452,108.934 161.452,105.759 161.833,105.378 164.627,105.378 164.851,105.602 USB_8.1@164.851,106.531 ; BC_4.4@191.683,135.671 191.364,135.671 190.662,134.969 C11_4.1@189.773,134.969 190.027,134.715 190.027,131.54 190.408,131.159 193.202,131.159 193.426,131.383 USB_4.1@193.426,132.312 ; BC_9.4@192.008,109.89 191.689,109.89 190.987,109.188 C11_9.1@190.098,109.188 190.352,108.934 190.352,105.759 190.733,105.378 193.527,105.378 193.751,105.602 USB_9.1@193.751,106.531
XTAL_N: C6.1 C6_1.1 C6_2.1 C6_3.1 C6_4.1 C6_5.1 C6_6.1 C6_7.1 C6_8.1 C6_9.1 M1.20 M1_1.20 M1_2.20 M1_3.20 M1_4.20 M1_5.20 M1_6.20 M1_7.20 M1_8.20 M1_9.20 OSC.2 OSC_1.2 OSC_2.2 OSC_3.2 OSC_4.2 OSC_5.2 OSC_6.2 OSC_7.2 OSC_8.2 OSC_9.2 | length 150.7
  Top Layer w0.2: C6_5.1@79.197,117.316 81.296,117.316 OSC_5.2@81.483,117.129 83.201,117.129 83.515,117.443 v1(83.515,118.459) ; C6.1@79.197,143.097 81.296,143.097 OSC.2@81.483,142.91 83.201,142.91 83.515,143.224 v1(83.515,144.24) ; M1_5.20@82.865,111.681 83.868,111.681 85.801,113.614 v1(85.801,113.887) ; M1.20@82.865,137.462 83.868,137.462 85.801,139.395 v1(85.801,139.668) ; C6_1.1@107.772,143.097 109.871,143.097 OSC_1.2@110.058,142.91 111.776,142.91 112.09,143.224 v1(112.09,144.24) ; C6_6.1@108.097,117.316 110.196,117.316 OSC_6.2@110.383,117.129 112.101,117.129 112.415,117.443 v1(112.415,118.459) ; M1_1.20@111.44,137.462 112.443,137.462 114.376,139.395 v1(114.376,139.668) ; M1_6.20@111.765,111.681 112.768,111.681 114.701,113.614 v1(114.701,113.887) ; C6_2.1@136.672,143.097 138.771,143.097 OSC_2.2@138.958,142.91 140.676,142.91 140.99,143.224 v1(140.99,144.24) ; C6_7.1@136.997,117.316 139.096,117.316 OSC_7.2@139.283,117.129 141.001,117.129 141.315,117.443 v1(141.315,118.459) ; M1_2.20@140.34,137.462 141.343,137.462 143.276,139.395 v1(143.276,139.668) ; M1_7.20@140.665,111.681 141.668,111.681 143.601,113.614 v1(143.601,113.887) ; C6_3.1@165.572,143.097 167.671,143.097 OSC_3.2@167.858,142.91 169.576,142.91 169.89,143.224 v1(169.89,144.24) ; C6_8.1@165.897,117.316 167.996,117.316 OSC_8.2@168.183,117.129 169.901,117.129 170.215,117.443 v1(170.215,118.459) ; M1_3.20@169.24,137.462 170.243,137.462 172.176,139.395 v1(172.176,139.668) ; M1_8.20@169.565,111.681 170.568,111.681 172.501,113.614 v1(172.501,113.887) ; C6_4.1@194.472,143.097 196.571,143.097 OSC_4.2@196.758,142.91 198.476,142.91 198.79,143.224 v1(198.79,144.24) ; C6_9.1@194.797,117.316 196.896,117.316 OSC_9.2@197.083,117.129 198.801,117.129 199.115,117.443 v1(199.115,118.459) ; M1_4.20@198.14,137.462 199.143,137.462 201.076,139.395 v1(201.076,139.668) ; M1_9.20@198.465,111.681 199.468,111.681 201.401,113.614 v1(201.401,113.887)
  Bottom Layer w0.2: v1(83.515,118.459) 85.801,116.173 v1(85.801,113.887) ; v1(83.515,144.24) 85.801,141.954 v1(85.801,139.668) ; v1(112.09,144.24) 114.376,141.954 v1(114.376,139.668) ; v1(112.415,118.459) 114.701,116.173 v1(114.701,113.887) ; v1(140.99,144.24) 143.276,141.954 v1(143.276,139.668) ; v1(141.315,118.459) 143.601,116.173 v1(143.601,113.887) ; v1(169.89,144.24) 172.176,141.954 v1(172.176,139.668) ; v1(170.215,118.459) 172.501,116.173 v1(172.501,113.887) ; v1(198.79,144.24) 201.076,141.954 v1(201.076,139.668) ; v1(199.115,118.459) 201.401,116.173 v1(201.401,113.887)
XTAL_P: C5.1 C5_1.1 C5_2.1 C5_3.1 C5_4.1 C5_5.1 C5_6.1 C5_7.1 C5_8.1 C5_9.1 M1.21 M1_1.21 M1_2.21 M1_3.21 M1_4.21 M1_5.21 M1_6.21 M1_7.21 M1_8.21 M1_9.21 OSC.1 OSC_1.1 OSC_2.1 OSC_3.1 OSC_4.1 OSC_5.1 OSC_6.1 OSC_7.1 OSC_8.1 OSC_9.1 | length 194.9
  Top Layer w0.2: C5_5.1@79.197,118.586 80.975,118.586 81.483,119.094 OSC_5.1@81.483,119.729 v1(85.166,119.729) ; C5.1@79.197,144.367 80.975,144.367 81.483,144.875 OSC.1@81.483,145.51 v1(85.166,145.51) ; M1_5.21@82.865,111.181 84.003,111.181 85.774,112.952 86.188,112.952 87.123,113.887 v1(87.579,113.887) ; M1.21@82.865,136.962 84.003,136.962 85.774,138.733 86.188,138.733 87.123,139.668 v1(87.579,139.668) ; C5_1.1@107.772,144.367 109.55,144.367 110.058,144.875 OSC_1.1@110.058,145.51 v1(113.741,145.51) ; C5_6.1@108.097,118.586 109.875,118.586 110.383,119.094 OSC_6.1@110.383,119.729 v1(114.066,119.729) ; M1_1.21@111.44,136.962 112.578,136.962 114.349,138.733 114.763,138.733 115.698,139.668 v1(116.154,139.668) ; M1_6.21@111.765,111.181 112.903,111.181 114.674,112.952 115.088,112.952 116.023,113.887 v1(116.479,113.887) ; C5_2.1@136.672,144.367 138.45,144.367 138.958,144.875 OSC_2.1@138.958,145.51 v1(142.641,145.51) ; C5_7.1@136.997,118.586 138.775,118.586 139.283,119.094 OSC_7.1@139.283,119.729 v1(142.966,119.729) ; M1_2.21@140.34,136.962 141.478,136.962 143.249,138.733 143.663,138.733 144.598,139.668 v1(145.054,139.668) ; M1_7.21@140.665,111.181 141.803,111.181 143.574,112.952 143.988,112.952 144.923,113.887 v1(145.379,113.887) ; C5_3.1@165.572,144.367 167.35,144.367 167.858,144.875 OSC_3.1@167.858,145.51 v1(171.541,145.51) ; C5_8.1@165.897,118.586 167.675,118.586 168.183,119.094 OSC_8.1@168.183,119.729 v1(171.866,119.729) ; M1_3.21@169.24,136.962 170.378,136.962 172.149,138.733 172.563,138.733 173.498,139.668 v1(173.954,139.668) ; M1_8.21@169.565,111.181 170.703,111.181 172.474,112.952 172.888,112.952 173.823,113.887 v1(174.279,113.887) ; C5_4.1@194.472,144.367 196.25,144.367 196.758,144.875 OSC_4.1@196.758,145.51 v1(200.441,145.51) ; C5_9.1@194.797,118.586 196.575,118.586 197.083,119.094 OSC_9.1@197.083,119.729 v1(200.766,119.729) ; M1_4.21@198.14,136.962 199.278,136.962 201.049,138.733 201.463,138.733 202.398,139.668 v1(202.854,139.668) ; M1_9.21@198.465,111.181 199.603,111.181 201.374,112.952 201.788,112.952 202.723,113.887 v1(203.179,113.887)
  Bottom Layer w0.2: v1(85.166,119.729) 85.166,118.713 87.579,116.3 v1(87.579,113.887) ; v1(85.166,145.51) 85.166,144.494 87.579,142.081 v1(87.579,139.668) ; v1(113.741,145.51) 113.741,144.494 116.154,142.081 v1(116.154,139.668) ; v1(114.066,119.729) 114.066,118.713 116.479,116.3 v1(116.479,113.887) ; v1(142.641,145.51) 142.641,144.494 145.054,142.081 v1(145.054,139.668) ; v1(142.966,119.729) 142.966,118.713 145.379,116.3 v1(145.379,113.887) ; v1(171.541,145.51) 171.541,144.494 173.954,142.081 v1(173.954,139.668) ; v1(171.866,119.729) 171.866,118.713 174.279,116.3 v1(174.279,113.887) ; v1(200.441,145.51) 200.441,144.494 202.854,142.081 v1(202.854,139.668) ; v1(200.766,119.729) 200.766,118.713 203.179,116.3 v1(203.179,113.887)
pads on no net: DBG.2 DBG.7 DBG_1.2 DBG_1.7 DBG_2.2 DBG_2.7 DBG_3.2 DBG_3.7 DBG_4.2 DBG_4.7 DBG_5.2 DBG_5.7 DBG_6.2 DBG_6.7 DBG_7.2 DBG_7.7 DBG_8.2 DBG_8.7 DBG_9.2 DBG_9.7 M1.2 M1.3 M1.8 M1.9 M1.10 M1.11 M1.12 M1.13 M1.14 M1.15 M1.17 M1.24 M1.27 M1.30 M1.31 M1.32 M1.33 M1.35 M1.36 M1.40 M1.42 M1.45 M1.46 M1.47 M1.48 M1_1.2 M1_1.3 M1_1.8 M1_1.9 M1_1.10 M1_1.11 M1_1.12 M1_1.13 M1_1.14 M1_1.15 M1_1.17 M1_1.24 M1_1.27 M1_1.30 M1_1.31 M1_1.32 M1_1.33 M1_1.35 M1_1.36 M1_1.40 M1_1.42 M1_1.45 M1_1.46 M1_1.47 M1_1.48 M1_2.2 M1_2.3 M1_2.8 M1_2.9 M1_2.10 M1_2.11 M1_2.12 M1_2.13 M1_2.14 M1_2.15 M1_2.17 M1_2.24 M1_2.27 M1_2.30 M1_2.31 M1_2.32 M1_2.33 M1_2.35 M1_2.36 M1_2.40 M1_2.42 M1_2.45 M1_2.46 M1_2.47 M1_2.48 M1_3.2 M1_3.3 M1_3.8 M1_3.9 M1_3.10 M1_3.11 M1_3.12 M1_3.13 M1_3.14 M1_3.15 M1_3.17 M1_3.24 M1_3.27 M1_3.30 M1_3.31 M1_3.32 M1_3.33 M1_3.35 M1_3.36 M1_3.40 M1_3.42 M1_3.45 M1_3.46 M1_3.47 M1_3.48 M1_4.2 M1_4.3 M1_4.8 M1_4.9 M1_4.10 M1_4.11 M1_4.12 M1_4.13 M1_4.14 M1_4.15 M1_4.17 M1_4.24 M1_4.27 M1_4.30 M1_4.31 M1_4.32 M1_4.33 M1_4.35 M1_4.36 M1_4.40 M1_4.42 M1_4.45 M1_4.46 M1_4.47 M1_4.48 M1_5.2 M1_5.3 M1_5.8 M1_5.9 M1_5.10 M1_5.11 M1_5.12 M1_5.13 M1_5.14 M1_5.15 M1_5.17 M1_5.24 M1_5.27 M1_5.30 M1_5.31 M1_5.32 M1_5.33 M1_5.35 M1_5.36 M1_5.40 M1_5.42 M1_5.45 M1_5.46 M1_5.47 M1_5.48 M1_6.2 M1_6.3 M1_6.8 M1_6.9 M1_6.10 M1_6.11 M1_6.12 M1_6.13 M1_6.14 M1_6.15 M1_6.17 M1_6.24 M1_6.27 M1_6.30 M1_6.31 M1_6.32 M1_6.33 M1_6.35 M1_6.36 M1_6.40 M1_6.42 M1_6.45 M1_6.46 M1_6.47 M1_6.48 M1_7.2 M1_7.3 M1_7.8 M1_7.9 M1_7.10 M1_7.11 M1_7.12 M1_7.13 M1_7.14 M1_7.15 M1_7.17 M1_7.24 M1_7.27 M1_7.30 M1_7.31 M1_7.32 M1_7.33 M1_7.35 M1_7.36 M1_7.40 M1_7.42 M1_7.45 M1_7.46 M1_7.47 M1_7.48 M1_8.2 M1_8.3 M1_8.8 M1_8.9 M1_8.10 M1_8.11 M1_8.12 M1_8.13 M1_8.14 M1_8.15 M1_8.17 M1_8.24 M1_8.27 M1_8.30 M1_8.31 M1_8.32 M1_8.33 M1_8.35 M1_8.36 M1_8.40 M1_8.42 M1_8.45 M1_8.46 M1_8.47 M1_8.48 M1_9.2 M1_9.3 M1_9.8 M1_9.9 M1_9.10 M1_9.11 M1_9.12 M1_9.13 M1_9.14 M1_9.15 M1_9.17 M1_9.24 M1_9.27 M1_9.30 M1_9.31 M1_9.32 M1_9.33 M1_9.35 M1_9.36 M1_9.40 M1_9.42 M1_9.45 M1_9.46 M1_9.47 M1_9.48 SW2. SW2_1. SW2_2. SW2_3. SW2_4. SW2_5. SW2_6. SW2_7. SW2_8. SW2_9. SW. SW.3 SW_1. SW_1.3 SW_2. SW_2.3 SW_3. SW_3.3 SW_4. SW_4.3 SW_5. SW_5.3 SW_6. SW_6.3 SW_7. SW_7.3 SW_8. SW_8.3 SW_9. SW_9.3 USB. USB.4 USB_1. USB_1.4 USB_2. USB_2.4 USB_3. USB_3.4 USB_4. USB_4.4 USB_5. USB_5.4 USB_6. USB_6.4 USB_7. USB_7.4 USB_8. USB_8.4 USB_9. USB_9.4

## Polygon pours and split planes (outlines as drawn)
GND on Top Layer "Bottom Layer-No Net" (solid, pour order 30): 65.405,153.67 93.345,153.67 93.345,128.651 65.405,128.651
GND on Top Layer "Bottom Layer-No Net" (solid, pour order 29): 93.98,153.67 121.92,153.67 121.92,128.651 93.98,128.651
GND on Top Layer "Bottom Layer-No Net" (solid, pour order 28): 122.88,153.67 150.82,153.67 150.82,128.651 122.88,128.651
GND on Top Layer "Bottom Layer-No Net" (solid, pour order 27): 151.78,153.67 179.72,153.67 179.72,128.651 151.78,128.651
GND on Top Layer "Bottom Layer-No Net" (solid, pour order 26): 180.68,153.67 208.62,153.67 208.62,128.651 180.68,128.651
GND on Top Layer "Bottom Layer-No Net" (solid, pour order 25): 65.405,127.889 93.345,127.889 93.345,102.87 65.405,102.87
GND on Top Layer "Bottom Layer-No Net" (solid, pour order 24): 94.305,127.889 122.245,127.889 122.245,102.87 94.305,102.87
GND on Top Layer "Bottom Layer-No Net" (solid, pour order 23): 123.205,127.889 151.145,127.889 151.145,102.87 123.205,102.87
GND on Top Layer "Bottom Layer-No Net" (solid, pour order 22): 152.105,127.889 180.045,127.889 180.045,102.87 152.105,102.87
GND on Top Layer "Bottom Layer-No Net" (solid, pour order 21): 181.005,127.889 208.945,127.889 208.945,102.87 181.005,102.87
GND on Bottom Layer "Bottom Layer-No Net" (solid, pour order 40): 65.405,153.67 93.345,153.67 93.345,128.651 65.405,128.651
GND on Bottom Layer "Bottom Layer-No Net" (solid, pour order 39): 93.98,153.67 121.92,153.67 121.92,128.651 93.98,128.651
GND on Bottom Layer "Bottom Layer-No Net" (solid, pour order 38): 122.88,153.67 150.82,153.67 150.82,128.651 122.88,128.651
GND on Bottom Layer "Bottom Layer-No Net" (solid, pour order 37): 151.78,153.67 179.72,153.67 179.72,128.651 151.78,128.651
GND on Bottom Layer "Bottom Layer-No Net" (solid, pour order 36): 180.68,153.67 208.62,153.67 208.62,128.651 180.68,128.651
GND on Bottom Layer "Bottom Layer-No Net" (solid, pour order 35): 65.405,127.889 93.345,127.889 93.345,102.87 65.405,102.87
GND on Bottom Layer "Bottom Layer-No Net" (solid, pour order 34): 94.305,127.889 122.245,127.889 122.245,102.87 94.305,102.87
GND on Bottom Layer "Bottom Layer-No Net" (solid, pour order 33): 123.205,127.889 151.145,127.889 151.145,102.87 123.205,102.87
GND on Bottom Layer "Bottom Layer-No Net" (solid, pour order 32): 152.105,127.889 180.045,127.889 180.045,102.87 152.105,102.87
GND on Bottom Layer "Bottom Layer-No Net" (solid, pour order 31): 181.005,127.889 208.945,127.889 208.945,102.87 181.005,102.87

## Keep-outs
Keep-Out Layer:
  the board outline again, w0.254

## Silkscreen, mask and mechanical layers (free items; w line width, h text height)
Mechanical 1:
  lines w0.254: 65.405,102.889 93.294,102.889 93.294,127.889 65.405,127.889 65.405,102.889 ; 65.405,128.67 65.405,153.67 93.294,153.67 93.294,128.67 65.405,128.67 ; 93.98,128.67 121.869,128.67 121.869,153.67 93.98,153.67 93.98,128.67 ; 94.305,102.889 122.194,102.889 122.194,127.889 94.305,127.889 94.305,102.889 ; 122.88,128.67 150.769,128.67 150.769,153.67 122.88,153.67 122.88,128.67 ; 123.205,102.889 151.094,102.889 151.094,127.889 123.205,127.889 123.205,102.889 ; 151.78,128.67 179.669,128.67 179.669,153.67 151.78,153.67 151.78,128.67 ; 152.105,102.889 179.994,102.889 179.994,127.889 152.105,127.889 152.105,102.889 ; 180.68,128.67 208.569,128.67 208.569,153.67 180.68,153.67 180.68,128.67 ; 181.005,102.889 208.894,102.889 208.894,127.889 181.005,127.889 181.005,102.889

## Text inside footprints (layer, text, board x,y; h text height)
BT1: Top Overlay "+" at 69.596,138.811 h1.15 r90
BT1_1: Top Overlay "+" at 98.171,138.811 h1.15 r90
BT1_2: Top Overlay "+" at 127.071,138.811 h1.15 r90
BT1_3: Top Overlay "+" at 155.971,138.811 h1.15 r90
BT1_4: Top Overlay "+" at 184.871,138.811 h1.15 r90
BT1_5: Top Overlay "+" at 69.596,113.03 h1.15 r90
BT1_6: Top Overlay "+" at 98.496,113.03 h1.15 r90
BT1_7: Top Overlay "+" at 127.396,113.03 h1.15 r90
BT1_8: Top Overlay "+" at 156.296,113.03 h1.15 r90
BT1_9: Top Overlay "+" at 185.196,113.03 h1.15 r90